# Altium PCB BRGTC6_Dual_Daughter.PcbDoc (part 2 of 2)
Units mil, origin at the board's own origin, x right, y up, seen from the top; angles counter-clockwise.
Board outline 5255 x 3080 mil, 4 copper layers (TOP, GND, PWR, BOT), stack 22.334 mil thick; 30 components, 45 nets, 287 pads, 36 vias.
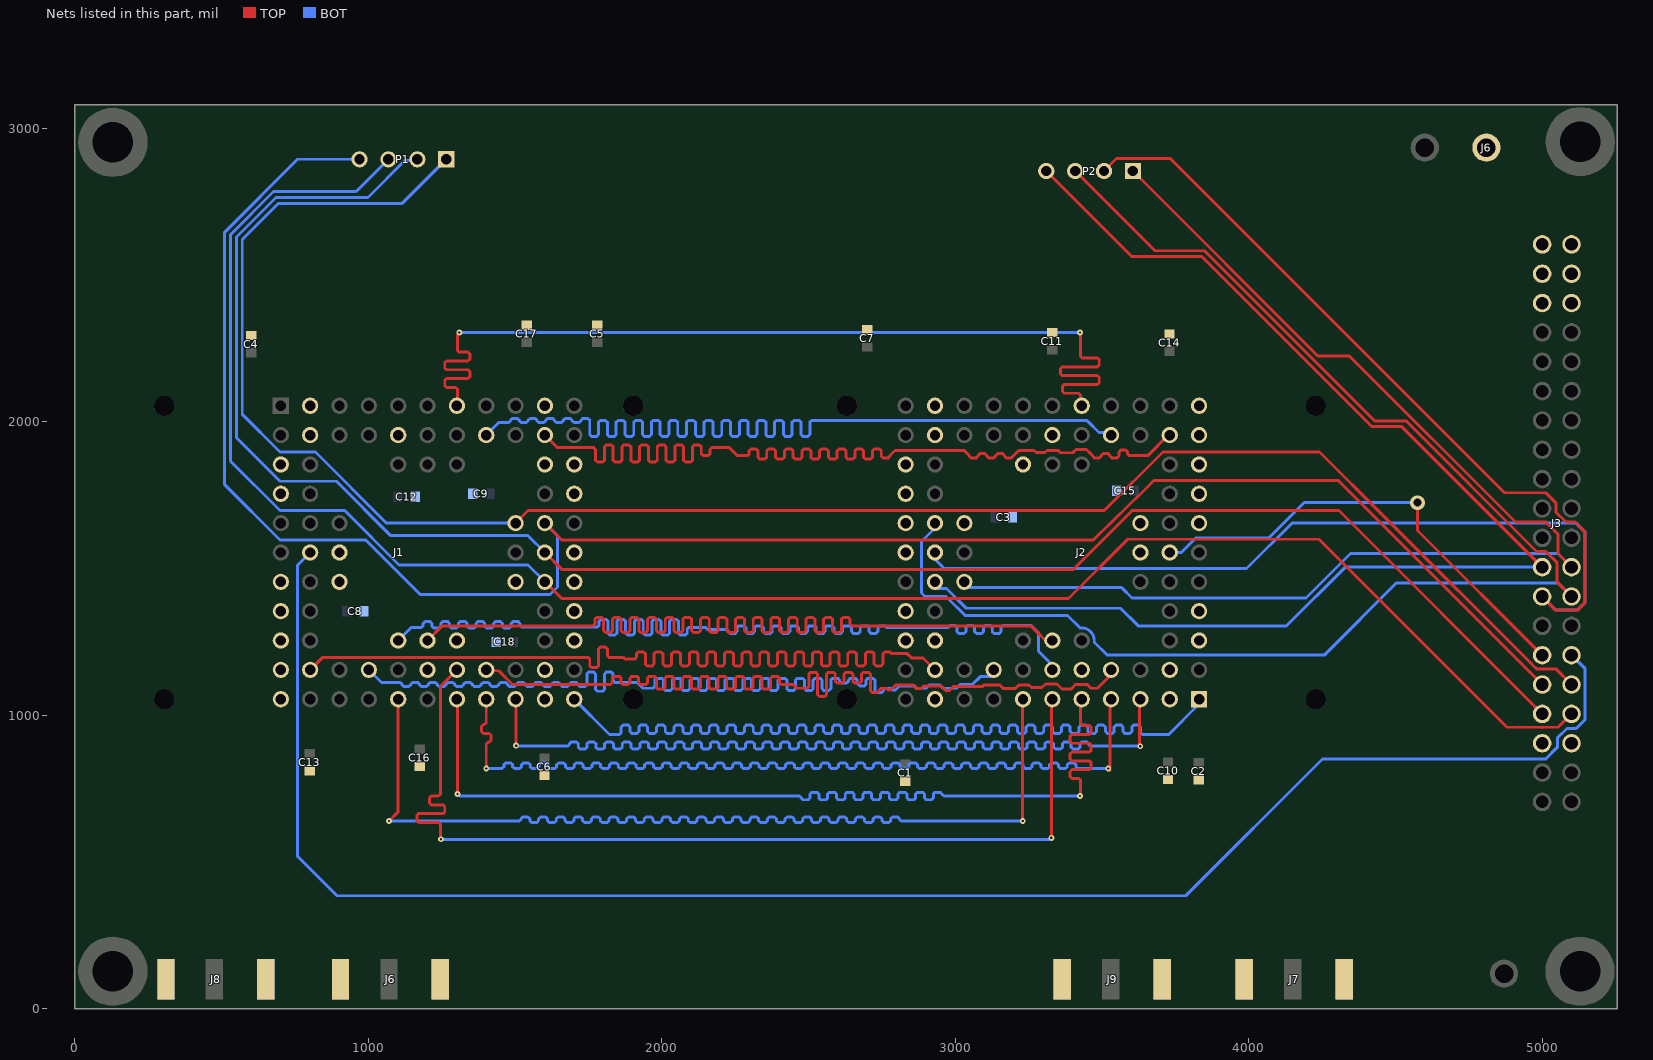
[diagram p4: the nets of this part, all layers, seen from the top]

## Via types
v1: diameter 19.68, hole 7.87, TOP to BOT, 30 vias
v2: diameter 50, hole 28, TOP to BOT, 6 vias

## Nets (pads, with @x,y where several pads share a name; then routed paths per layer and width w, separated by ;. In a path a pad name is that pad's centre, name@x,y a point inside that pad or via, vN(x,y) a via of type N, cw(c..) or ccw(c..) an arc to the next point about the centre after c; other vN are vias at no path point) (continued)
CRED_MSG_1_0_0: J1.L11 J2.A1 | length 3453.2
  BOT w10: J1.L11@1701.46,1055 1821.46,935 1855.46,935 1861.46,941 1861.46,960.35 1867.46,966.35 1885.46,966.35 1891.46,960.35 1891.46,944.85 1897.46,938.85 1915.46,938.85 1921.46,944.85 1921.46,960.35 1927.46,966.35 1945.46,966.35 1951.46,960.35 1951.46,944.85 1957.46,938.85 1975.46,938.85 1981.46,944.85 1981.46,960.35 1987.46,966.35 2005.46,966.35 2011.46,960.35 2011.46,944.85 2017.46,938.85 2035.46,938.85 2041.46,944.85 2041.46,960.35 2047.46,966.35 2065.46,966.35 2071.46,960.35 2071.46,944.85 2077.46,938.85 2095.46,938.85 2101.46,944.85 2101.46,960.35 2107.46,966.35 2125.46,966.35 2131.46,960.35 2131.46,944.85 2137.46,938.85 2155.46,938.85 2161.46,944.85 2161.46,960.35 2167.46,966.35 2185.46,966.35 2191.46,960.35 2191.46,944.85 2197.46,938.85 2215.46,938.85 2221.46,944.85 2221.46,960.35 2227.46,966.35 2245.46,966.35 2251.46,960.35 2251.46,944.85 2257.46,938.85 2275.46,938.85 2281.46,944.85 2281.46,960.35 2287.46,966.35 2305.46,966.35 2311.46,960.35 2311.46,944.85 2317.46,938.85 2335.46,938.85 2341.46,944.85 2341.46,960.35 2347.46,966.35 2365.46,966.35 2371.46,960.35 2371.46,944.85 2377.46,938.85 2395.46,938.85 2401.46,944.85 2401.46,960.35 2407.46,966.35 2425.46,966.35 2431.46,960.35 2431.46,944.85 2437.46,938.85 2455.46,938.85 2461.46,944.85 2461.46,960.35 2467.46,966.35 2485.46,966.35 2491.46,960.35 2491.46,944.85 2497.46,938.85 2515.46,938.85 2521.46,944.85 2521.46,960.35 2527.46,966.35 2545.46,966.35 2551.46,960.35 2551.46,944.85 2557.46,938.85 2575.46,938.85 2581.46,944.85 2581.46,960.35 2587.46,966.35 2605.46,966.35 2611.46,960.35 2611.46,944.85 2617.46,938.85 2635.46,938.85 2641.46,944.85 2641.46,960.35 2647.46,966.35 2665.46,966.35 2671.46,960.35 2671.46,944.85 2677.46,938.85 2695.46,938.85 2701.46,944.85 2701.46,960.35 2707.46,966.35 2725.46,966.35 2731.46,960.35 2731.46,944.85 2737.46,938.85 2755.46,938.85 2761.46,944.85 2761.46,960.35 2767.46,966.35 2785.46,966.35 2791.46,960.35 2791.46,944.85 2797.46,938.85 2815.46,938.85 2821.46,944.85 2821.46,960.35 2827.46,966.35 2845.46,966.35 2851.46,960.35 2851.46,944.85 2857.46,938.85 2875.46,938.85 2881.46,944.85 2881.46,960.35 2887.46,966.35 2905.46,966.35 2911.46,960.35 2911.46,944.85 2917.46,938.85 2935.46,938.85 2941.46,944.85 2941.46,960.35 2947.46,966.35 2965.46,966.35 2971.46,960.35 2971.46,944.85 2977.46,938.85 2995.46,938.85 3001.46,944.85 3001.46,960.35 3007.46,966.35 3025.46,966.35 3031.46,960.35 3031.46,944.85 3037.46,938.85 3055.46,938.85 3061.46,944.85 3061.46,960.35 3067.46,966.35 3085.46,966.35 3091.46,960.35 3091.46,944.85 3097.46,938.85 3115.46,938.85 3121.46,944.85 3121.46,960.35 3127.46,966.35 3145.46,966.35 3151.46,960.35 3151.46,944.85 3157.46,938.85 3175.46,938.85 3181.46,944.85 3181.46,960.35 3187.46,966.35 3205.46,966.35 3211.46,960.35 3211.46,944.85 3217.46,938.85 3235.46,938.85 3241.46,944.85 3241.46,960.35 3247.46,966.35 3265.46,966.35 3271.46,960.35 3271.46,944.85 3277.46,938.85 3295.46,938.85 3301.46,944.85 3301.46,960.35 3307.46,966.35 3325.46,966.35 3331.46,960.35 3331.46,944.85 3337.46,938.85 3355.46,938.85 3361.46,944.85 3361.46,960.35 3367.46,966.35 3385.46,966.35 3391.46,960.35 3391.46,944.85 3397.46,938.85 3415.46,938.85 3421.46,944.85 3421.46,960.35 3427.46,966.35 3445.46,966.35 3451.46,960.35 3451.46,944.85 3457.46,938.85 3475.46,938.85 3481.46,944.85 3481.46,960.35 3487.46,966.35 3505.46,966.35 3511.46,960.35 3511.46,944.85 3517.46,938.85 3535.46,938.85 3541.46,944.85 3541.46,960.35 3547.46,966.35 3565.46,966.35 3571.46,960.35 3571.46,944.85 3577.46,938.85 3595.46,938.85 3601.46,944.85 3601.46,960.35 3607.46,966.35 3625.46,966.35 3631.46,960.35 3631.46,941 3637.46,935 3727.36,935 J2.A1@3827.36,1035
CRED_MSG_1_0_1: J1.L9 J2.A3 | length 3425.9
  TOP w10: J1.L9@1501.46,1055 1503.23,1053.23 v1(1503.23,896.77) ; J2.A3@3627.36,1035 3627.36,897.64 v1(3630,895)
  BOT w10: v1(1503.23,896.77) 1505,895 1679,895 1685,901 1685,903.27 1691,909.27 1709,909.27 1715,903.27 1715,891.28 1721,885.28 1739,885.28 1745,891.28 1745,903.27 1751,909.27 1769,909.27 1775,903.27 1775,891.28 1781,885.28 1799,885.28 1805,891.28 1805,903.27 1811,909.27 1829,909.27 1835,903.27 1835,891.28 1841,885.28 1859,885.28 1865,891.28 1865,903.27 1871,909.27 1889,909.27 1895,903.27 1895,891.28 1901,885.28 1919,885.28 1925,891.28 1925,903.27 1931,909.27 1949,909.27 1955,903.27 1955,891.28 1961,885.28 1979,885.28 1985,891.28 1985,903.27 1991,909.27 2009,909.27 2015,903.27 2015,891.28 2021,885.28 2039,885.28 2045,891.28 2045,903.27 2051,909.27 2069,909.27 2075,903.27 2075,891.28 2081,885.28 2099,885.28 2105,891.28 2105,903.27 2111,909.27 2129,909.27 2135,903.27 2135,891.28 2141,885.28 2159,885.28 2165,891.28 2165,903.27 2171,909.27 2189,909.27 2195,903.27 2195,891.28 2201,885.28 2219,885.28 2225,891.28 2225,903.27 2231,909.27 2249,909.27 2255,903.27 2255,891.28 2261,885.28 2279,885.28 2285,891.28 2285,903.27 2291,909.27 2309,909.27 2315,903.27 2315,891.28 2321,885.28 2339,885.28 2345,891.28 2345,903.27 2351,909.27 2369,909.27 2375,903.27 2375,891.28 2381,885.28 2399,885.28 2405,891.28 2405,903.27 2411,909.27 2429,909.27 2435,903.27 2435,891.28 2441,885.28 2459,885.28 2465,891.28 2465,903.27 2471,909.27 2489,909.27 2495,903.27 2495,891.28 2501,885.28 2519,885.28 2525,891.28 2525,903.27 2531,909.27 2549,909.27 2555,903.27 2555,891.28 2561,885.28 2579,885.28 2585,891.28 2585,903.27 2591,909.27 2609,909.27 2615,903.27 2615,891.28 2621,885.28 2639,885.28 2645,891.28 2645,903.27 2651,909.27 2669,909.27 2675,903.27 2675,891.28 2681,885.28 2699,885.28 2705,891.28 2705,903.27 2711,909.27 2729,909.27 2735,903.27 2735,891.28 2741,885.28 2759,885.28 2765,891.28 2765,903.27 2771,909.27 2789,909.27 2795,903.27 2795,891.28 2801,885.28 2819,885.28 2825,891.28 2825,903.27 2831,909.27 2849,909.27 2855,903.27 2855,891.28 2861,885.28 2879,885.28 2885,891.28 2885,903.27 2891,909.27 2909,909.27 2915,903.27 2915,891.28 2921,885.28 2939,885.28 2945,891.28 2945,903.27 2951,909.27 2969,909.27 2975,903.27 2975,891.28 2981,885.28 2999,885.28 3005,891.28 3005,903.27 3011,909.27 3029,909.27 3035,903.27 3035,891.28 3041,885.28 3059,885.28 3065,891.28 3065,903.27 3071,909.27 3089,909.27 3095,903.27 3095,891.28 3101,885.28 3119,885.28 3125,891.28 3125,903.27 3131,909.27 3149,909.27 3155,903.27 3155,891.28 3161,885.28 3179,885.28 3185,891.28 3185,903.27 3191,909.27 3209,909.27 3215,903.27 3215,891.28 3221,885.28 3239,885.28 3245,891.28 3245,903.27 3251,909.27 3269,909.27 3275,903.27 3275,891.28 3281,885.28 3299,885.28 3305,891.28 3305,903.27 3311,909.27 3329,909.27 3335,903.27 3335,891.28 3341,885.28 3359,885.28 3365,891.28 3365,903.27 3371,909.27 3389,909.27 3395,903.27 3395,891.28 3401,885.28 3419,885.28 3425,891.28 3425,903.27 3431,909.27 3449,909.27 3455,903.27 3455,901 3461,895 v1(3630,895)
CRED_MSG_1_0_2: J1.L8 J2.A4 | length 3426.1
  TOP w10: v1(1401.46,818.54) 1401.46,902.54 1407.46,908.54 1411.33,908.54 1417.33,914.54 1417.33,932.54 1411.33,938.54 1391.58,938.54 1385.58,944.54 1385.58,962.54 1391.58,968.54 1395.46,968.54 1401.46,974.54 J1.L8@1401.46,1055 ; v1(3521.46,818.54) 3527.27,812.73 3527.31,812.78 3527.31,1034.95 J2.A4@3527.36,1035
  BOT w10: v1(1401.46,818.54) 1455.46,818.54 1461.46,824.54 1461.46,831.54 1467.46,837.54 1485.46,837.54 1491.46,831.54 1491.46,824.44 1497.46,818.44 1515.46,818.44 1521.46,824.44 1521.46,831.54 1527.46,837.54 1545.46,837.54 1551.46,831.54 1551.46,824.44 1557.46,818.44 1575.46,818.44 1581.46,824.44 1581.46,831.54 1587.46,837.54 1605.46,837.54 1611.46,831.54 1611.46,824.44 1617.46,818.44 1635.46,818.44 1641.46,824.44 1641.46,831.54 1647.46,837.54 1665.46,837.54 1671.46,831.54 1671.46,824.44 1677.46,818.44 1695.46,818.44 1701.46,824.44 1701.46,831.54 1707.46,837.54 1725.46,837.54 1731.46,831.54 1731.46,824.44 1737.46,818.44 1755.46,818.44 1761.46,824.44 1761.46,831.54 1767.46,837.54 1785.46,837.54 1791.46,831.54 1791.46,824.44 1797.46,818.44 1815.46,818.44 1821.46,824.44 1821.46,831.54 1827.46,837.54 1845.46,837.54 1851.46,831.54 1851.46,824.44 1857.46,818.44 1875.46,818.44 1881.46,824.44 1881.46,831.54 1887.46,837.54 1905.46,837.54 1911.46,831.54 1911.46,824.44 1917.46,818.44 1935.46,818.44 1941.46,824.44 1941.46,831.54 1947.46,837.54 1965.46,837.54 1971.46,831.54 1971.46,824.44 1977.46,818.44 1995.46,818.44 2001.46,824.44 2001.46,831.54 2007.46,837.54 2025.46,837.54 2031.46,831.54 2031.46,824.44 2037.46,818.44 2055.46,818.44 2061.46,824.44 2061.46,831.54 2067.46,837.54 2085.46,837.54 2091.46,831.54 2091.46,824.44 2097.46,818.44 2115.46,818.44 2121.46,824.44 2121.46,831.54 2127.46,837.54 2145.46,837.54 2151.46,831.54 2151.46,824.44 2157.46,818.44 2175.46,818.44 2181.46,824.44 2181.46,831.54 2187.46,837.54 2205.46,837.54 2211.46,831.54 2211.46,824.44 2217.46,818.44 2235.46,818.44 2241.46,824.44 2241.46,831.54 2247.46,837.54 2265.46,837.54 2271.46,831.54 2271.46,824.44 2277.46,818.44 2295.46,818.44 2301.46,824.44 2301.46,831.54 2307.46,837.54 2325.46,837.54 2331.46,831.54 2331.46,824.44 2337.46,818.44 2355.46,818.44 2361.46,824.44 2361.46,831.54 2367.46,837.54 2385.46,837.54 2391.46,831.54 2391.46,824.44 2397.46,818.44 2415.46,818.44 2421.46,824.44 2421.46,831.54 2427.46,837.54 2445.46,837.54 2451.46,831.54 2451.46,824.44 2457.46,818.44 2475.46,818.44 2481.46,824.44 2481.46,831.54 2487.46,837.54 2505.46,837.54 2511.46,831.54 2511.46,824.44 2517.46,818.44 2535.46,818.44 2541.46,824.44 2541.46,831.54 2547.46,837.54 2565.46,837.54 2571.46,831.54 2571.46,824.44 2577.46,818.44 2595.46,818.44 2601.46,824.44 2601.46,831.54 2607.46,837.54 2625.46,837.54 2631.46,831.54 2631.46,824.44 2637.46,818.44 2655.46,818.44 2661.46,824.44 2661.46,831.54 2667.46,837.54 2685.46,837.54 2691.46,831.54 2691.46,824.44 2697.46,818.44 2715.46,818.44 2721.46,824.44 2721.46,831.54 2727.46,837.54 2745.46,837.54 2751.46,831.54 2751.46,824.44 2757.46,818.44 2775.46,818.44 2781.46,824.44 2781.46,831.54 2787.46,837.54 2805.46,837.54 2811.46,831.54 2811.46,824.44 2817.46,818.44 2835.46,818.44 2841.46,824.44 2841.46,831.54 2847.46,837.54 2865.46,837.54 2871.46,831.54 2871.46,824.44 2877.46,818.44 2895.46,818.44 2901.46,824.44 2901.46,831.54 2907.46,837.54 2925.46,837.54 2931.46,831.54 2931.46,824.44 2937.46,818.44 2955.46,818.44 2961.46,824.44 2961.46,831.54 2967.46,837.54 2985.46,837.54 2991.46,831.54 2991.46,824.44 2997.46,818.44 3015.46,818.44 3021.46,824.44 3021.46,831.54 3027.46,837.54 3045.46,837.54 3051.46,831.54 3051.46,824.44 3057.46,818.44 3075.46,818.44 3081.46,824.44 3081.46,831.54 3087.46,837.54 3105.46,837.54 3111.46,831.54 3111.46,824.44 3117.46,818.44 3135.46,818.44 3141.46,824.44 3141.46,831.54 3147.46,837.54 3165.46,837.54 3171.46,831.54 3171.46,824.44 3177.46,818.44 3195.46,818.44 3201.46,824.44 3201.46,831.54 3207.46,837.54 3225.46,837.54 3231.46,831.54 3231.46,824.44 3237.46,818.44 3255.46,818.44 3261.46,824.44 3261.46,831.54 3267.46,837.54 3285.46,837.54 3291.46,831.54 3291.46,824.44 3297.46,818.44 3315.46,818.44 3321.46,824.44 3321.46,831.54 3327.46,837.54 3345.46,837.54 3351.46,831.54 3351.46,824.44 3357.46,818.44 3375.46,818.44 3381.46,824.44 3381.46,831.54 3387.46,837.54 3405.46,837.54 3411.46,831.54 3411.46,824.54 3417.46,818.54 v1(3521.46,818.54)
CRED_MSG_1_0_3: J1.K8 J2.B4 | length 3267.3
  TOP w10: J1.K8@1401.46,1155 1404.58,1151.87 1444.17,1151.87 1491.01,1105.04 1825.01,1105.04 1831.01,1111.04 1831.01,1127.03 1837.01,1133.03 1855.01,1133.03 1861.01,1127.03 1861.01,1111.04 1867.01,1105.04 1885.01,1105.04 1891.01,1111.04 1891.01,1127.03 1897.01,1133.03 1915.01,1133.03 1921.01,1127.03 1921.01,1111.04 1927.01,1105.04 1945.01,1105.04 1951.01,1111.04 1951.01,1127.03 1957.01,1133.03 1975.01,1133.03 1981.01,1127.03 1981.01,1095.06 1987.01,1089.06 2005.01,1089.06 2011.01,1095.06 2011.01,1127.03 2017.01,1133.03 2035.01,1133.03 2041.01,1127.03 2041.01,1095.06 2047.01,1089.06 2065.01,1089.06 2071.01,1095.06 2071.01,1127.03 2077.01,1133.03 2095.01,1133.03 2101.01,1127.03 2101.01,1095.06 2107.01,1089.06 2125.01,1089.06 2131.01,1095.06 2131.01,1127.03 2137.01,1133.03 2155.01,1133.03 2161.01,1127.03 2161.01,1095.06 2167.01,1089.06 2185.01,1089.06 2191.01,1095.06 2191.01,1127.03 2197.01,1133.03 2215.01,1133.03 2221.01,1127.03 2221.01,1095.06 2227.01,1089.06 2245.01,1089.06 2251.01,1095.06 2251.01,1127.03 2257.01,1133.03 2275.01,1133.03 2281.01,1127.03 2281.01,1095.06 2287.01,1089.06 2305.01,1089.06 2311.01,1095.06 2311.01,1127.03 2317.01,1133.03 2335.01,1133.03 2341.01,1127.03 2341.01,1095.06 2347.01,1089.06 2365.01,1089.06 2371.01,1095.06 2371.01,1127.03 2377.01,1133.03 2395.01,1133.03 2401.01,1127.03 2401.01,1111.04 2407.01,1105.04 2448.01,1105.04 2460.76,1092.28 2494.76,1092.28 2500.76,1098.28 2500.76,1140.65 2506.76,1146.65 2524.76,1146.65 2530.76,1140.65 2530.76,1070.37 2536.76,1064.37 2554.76,1064.37 2560.76,1070.37 2560.76,1140.65 2566.76,1146.65 2584.76,1146.65 2590.76,1140.65 2590.76,1115.86 2596.62,1110 2614.9,1110 2620.76,1115.86 2620.76,1140.65 2626.76,1146.65 2644.76,1146.65 2650.76,1140.65 2650.76,1115.86 2656.62,1110 2674.9,1110 2680.76,1115.86 2680.76,1140.65 2686.76,1146.65 2704.76,1146.65 2710.76,1140.65 2710.76,1083.82 2716.76,1077.82 2734.76,1077.82 2740.76,1083.82 2740.76,1085.97 2746.76,1091.97 2764.76,1091.97 2770.76,1085.97 2779.13,1085.97 2795.95,1102.78 2855.95,1102.78 2866.76,1091.97 2884.76,1091.97 2892.79,1100 2952.29,1100 2968.47,1083.82 2980.76,1083.82 2980.76,1085.97 2992.51,1097.72 3091.62,1097.72 3096.69,1102.78 3152.22,1102.78 3163.03,1091.97 3205.13,1091.97 3215.95,1102.78 3251.13,1102.78 3259.37,1094.55 3294.55,1094.55 3307.26,1107.26 3346.76,1107.26 3364.03,1090 3395,1090 3410,1105 3450,1105 3462.72,1092.28 3484.65,1092.28 J2.B4@3527.36,1135
CRED_MSG_1_0_4: J1.K7 J2.A6 | length 3377.3
  TOP w10: v1(1247.5,577.5) 1245,575 1245,629 1239,635 1170.86,635 1165,640.86 1165,659.14 1170.86,665 1254.14,665 1260,670.86 1260,689.14 1254.14,695 1214.19,695 1208.19,701 1208.19,719 1214.19,725 1239,725 1245,731 1245,1098.54 J1.K7@1301.46,1155 ; v1(3327.36,582.36) J2.A6@3327.36,1035
  BOT w10: v1(1247.5,577.5) 3322.5,577.5 v1(3327.36,582.36)
CRED_MSG_1_0_5: J1.L7 J2.A5 | length 3426.3
  TOP w10: J1.L7@1301.46,1055 1303.23,1053.23 v1(1303.23,731.77) ; v1(3425,725) 3427.36,727.36 3427.36,779 3421.36,785 3397.58,785 3391.58,791 3391.58,809 3397.58,815 3457.14,815 3463.14,821 3463.14,839 3457.14,845 3397.58,845 3391.58,851 3391.58,869 3397.58,875 3457.14,875 3463.14,881 3463.14,899 3457.14,905 3397.58,905 3391.58,911 3391.58,929 3397.58,935 3457.14,935 3463.14,941 3463.14,959 3457.14,965 3433.36,965 3427.36,971 J2.A5@3427.36,1035
  BOT w10: v1(1303.23,731.77) 1310,725 2469,725 2475,719 2475,718.32 2481,712.32 2499,712.32 2505,718.32 2505,731.7 2511,737.7 2529,737.7 2535,731.7 2535,718.32 2541,712.32 2559,712.32 2565,718.32 2565,731.7 2571,737.7 2589,737.7 2595,731.7 2595,718.32 2601,712.32 2619,712.32 2625,718.32 2625,731.7 2631,737.7 2649,737.7 2655,731.7 2655,718.32 2661,712.32 2679,712.32 2685,718.32 2685,731.7 2691,737.7 2709,737.7 2715,731.7 2715,718.32 2721,712.32 2739,712.32 2745,718.32 2745,731.7 2751,737.7 2769,737.7 2775,731.7 2775,718.32 2781,712.32 2799,712.32 2805,718.32 2805,731.7 2811,737.7 2829,737.7 2835,731.7 2835,718.32 2841,712.32 2859,712.32 2865,718.32 2865,731.7 2871,737.7 2889,737.7 2895,731.7 2895,718.32 2901,712.32 2919,712.32 2925,718.32 2925,731.7 2931,737.7 2949,737.7 2955,731.7 2955,731 2961,725 v1(3425,725)
CRED_MSG_1_0_6: J1.J6 J2.C6 | length 3453.2
  TOP w10: J1.J6@1201.46,1255 1251.46,1305 1765.46,1305 1771.46,1311 1771.46,1327.75 1777.46,1333.75 1795.46,1333.75 1801.46,1327.75 1801.46,1288.64 1807.46,1282.64 1825.46,1282.64 1831.46,1288.64 1831.46,1327.75 1837.46,1333.75 1855.46,1333.75 1861.46,1327.75 1861.46,1288.64 1867.46,1282.64 1885.46,1282.64 1891.46,1288.64 1891.46,1327.75 1897.46,1333.75 1915.46,1333.75 1921.46,1327.75 1921.46,1288.64 1927.46,1282.64 1945.46,1282.64 1951.46,1288.64 1951.46,1327.75 1957.46,1333.75 1975.46,1333.75 1981.46,1327.75 1981.46,1288.64 1987.46,1282.64 2005.46,1282.64 2011.46,1288.64 2011.46,1327.75 2017.46,1333.75 2035.46,1333.75 2041.46,1327.75 2041.46,1288.64 2047.46,1282.64 2065.46,1282.64 2071.46,1288.64 2071.46,1327.75 2077.46,1333.75 2095.46,1333.75 2101.46,1327.75 2101.46,1288.64 2107.46,1282.64 2125.46,1282.64 2131.46,1288.64 2131.46,1327.75 2137.46,1333.75 2155.46,1333.75 2161.46,1327.75 2161.46,1288.64 2167.46,1282.64 2185.46,1282.64 2191.46,1288.64 2191.46,1327.75 2197.46,1333.75 2215.46,1333.75 2221.46,1327.75 2221.46,1288.64 2227.46,1282.64 2245.46,1282.64 2251.46,1288.64 2251.46,1327.75 2257.46,1333.75 2275.46,1333.75 2281.46,1327.75 2281.46,1288.64 2287.46,1282.64 2305.46,1282.64 2311.46,1288.64 2311.46,1327.75 2317.46,1333.75 2335.46,1333.75 2341.46,1327.75 2341.46,1288.64 2347.46,1282.64 2365.46,1282.64 2371.46,1288.64 2371.46,1327.75 2377.46,1333.75 2395.46,1333.75 2401.46,1327.75 2401.46,1288.64 2407.46,1282.64 2425.46,1282.64 2431.46,1288.64 2431.46,1327.75 2437.46,1333.75 2455.46,1333.75 2461.46,1327.75 2461.46,1288.64 2467.46,1282.64 2485.46,1282.64 2491.46,1288.64 2491.46,1327.75 2497.46,1333.75 2515.46,1333.75 2521.46,1327.75 2521.46,1288.64 2527.46,1282.64 2545.46,1282.64 2551.46,1288.64 2551.46,1327.75 2557.46,1333.75 2575.46,1333.75 2581.46,1327.75 2581.46,1288.64 2587.46,1282.64 2605.46,1282.64 2611.46,1288.64 2611.46,1327.75 2617.46,1333.75 2635.46,1333.75 2641.46,1327.75 2641.46,1311 2647.46,1305 3257.36,1305 J2.C6@3327.36,1235
CRED_MSG_1_0_7: J1.J5 J2.B6 | length 3446.2
  BOT w10: J1.J5@1101.46,1255 1146.46,1300 1180.46,1300 1186.46,1306 1186.46,1313.25 1192.46,1319.25 1210.46,1319.25 1216.46,1313.25 1216.46,1303.72 1222.46,1297.72 1240.46,1297.72 1246.46,1303.72 1246.46,1313.25 1252.46,1319.25 1270.46,1319.25 1276.46,1313.25 1276.46,1303.72 1282.46,1297.72 1300.46,1297.72 1306.46,1303.72 1306.46,1313.25 1312.46,1319.25 1330.46,1319.25 1336.46,1313.25 1336.46,1303.72 1342.46,1297.72 1360.46,1297.72 1366.46,1303.72 1366.46,1313.25 1372.46,1319.25 1390.46,1319.25 1396.46,1313.25 1396.46,1303.72 1402.46,1297.72 1420.46,1297.72 1426.46,1303.72 1426.46,1313.25 1432.46,1319.25 1450.46,1319.25 1456.46,1313.25 1456.46,1303.72 1462.46,1297.72 1480.46,1297.72 1486.46,1303.72 1486.46,1313.25 1492.46,1319.25 1510.46,1319.25 1516.46,1313.25 1516.46,1307.34 1522.46,1301.34 1780.46,1301.34 1786.46,1307.34 1786.46,1320.61 1792.46,1326.61 1810.46,1326.61 1816.46,1320.61 1816.46,1279.39 1822.46,1273.39 1840.46,1273.39 1846.46,1279.39 1846.46,1320.61 1852.46,1326.61 1870.46,1326.61 1876.46,1320.61 1876.46,1279.39 1882.46,1273.39 1900.46,1273.39 1906.46,1279.39 1906.46,1320.61 1912.46,1326.61 1930.46,1326.61 1936.46,1320.61 1936.46,1279.39 1942.46,1273.39 1960.46,1273.39 1966.46,1279.39 1966.46,1320.61 1972.46,1326.61 1990.46,1326.61 1996.46,1320.61 1996.46,1279.39 2002.46,1273.39 2020.46,1273.39 2026.46,1279.39 2026.46,1320.61 2032.46,1326.61 2050.46,1326.61 2056.46,1320.61 2056.46,1279.39 2062.46,1273.39 2080.46,1273.39 2086.46,1279.39 2086.46,1294 2092.46,1300 2148.26,1300 2155.98,1292.28 2219.98,1292.28 2225.98,1286.28 2225.98,1285.4 2231.98,1279.4 2249.98,1279.4 2255.98,1285.4 2255.98,1299.15 2261.98,1305.15 2279.98,1305.15 2285.98,1299.15 2285.98,1285.4 2291.98,1279.4 2309.98,1279.4 2315.98,1285.4 2315.98,1299.15 2321.98,1305.15 2339.98,1305.15 2345.98,1299.15 2345.98,1285.4 2351.98,1279.4 2369.98,1279.4 2375.98,1285.4 2375.98,1299.15 2381.98,1305.15 2399.98,1305.15 2405.98,1299.15 2405.98,1285.4 2411.98,1279.4 2429.98,1279.4 2435.98,1285.4 2435.98,1299.15 2441.98,1305.15 2459.98,1305.15 2465.98,1299.15 2465.98,1285.4 2471.98,1279.4 2489.98,1279.4 2495.98,1285.4 2495.98,1299.15 2501.98,1305.15 2519.98,1305.15 2525.98,1299.15 2525.98,1285.4 2531.98,1279.4 2549.98,1279.4 2555.98,1285.4 2555.98,1299.15 2561.98,1305.15 2579.98,1305.15 2585.98,1299.15 2585.98,1285.4 2591.98,1279.4 2609.98,1279.4 2615.98,1285.4 2615.98,1299.15 2621.98,1305.15 2639.98,1305.15 2645.98,1299.15 2645.98,1285.4 2651.98,1279.4 2669.98,1279.4 2675.98,1285.4 2675.98,1299.15 2681.98,1305.15 2699.98,1305.15 2705.98,1299.15 2705.98,1285.4 2711.98,1279.4 2729.98,1279.4 2735.98,1285.4 2735.98,1299.15 2741.98,1305.15 2759.98,1305.15 2765.98,1299.15 2975.61,1299.15 2981.98,1305.51 2999.98,1305.51 3005.98,1299.51 3005.98,1285.01 3011.98,1279.01 3029.98,1279.01 3035.98,1285.01 3035.98,1299.51 3041.98,1305.51 3059.98,1305.51 3065.98,1299.51 3065.98,1285.01 3071.98,1279.01 3089.98,1279.01 3095.98,1285.01 3095.98,1299.51 3101.98,1305.51 3119.98,1305.51 3125.98,1299.51 3125.98,1285.01 3131.98,1279.01 3149.98,1279.01 3155.98,1285.01 3155.98,1299.51 3161.98,1305.51 3259.49,1305.51 3283.24,1281.76 3283.24,1218.72 3324.24,1177.72 3324.24,1138.13 J2.B6@3327.36,1135
CRED_REPAIR_0_1: J1.B10 J2.K2 | length 3382.2
  TOP w10: J1.B10@1601.46,1955 1644.17,1912.28 1768.17,1912.28 1774.17,1906.28 1774.17,1869.31 1780.17,1863.31 1798.17,1863.31 1804.17,1869.31 1804.17,1915.25 1810.17,1921.25 1828.17,1921.25 1834.17,1915.25 1834.17,1869.31 1840.17,1863.31 1858.17,1863.31 1864.17,1869.31 1864.17,1915.25 1870.17,1921.25 1888.17,1921.25 1894.17,1915.25 1894.17,1869.31 1900.17,1863.31 1918.17,1863.31 1924.17,1869.31 1924.17,1915.25 1930.17,1921.25 1948.17,1921.25 1954.17,1915.25 1954.17,1869.31 1960.17,1863.31 1978.17,1863.31 1984.17,1869.31 1984.17,1915.25 1990.17,1921.25 2008.17,1921.25 2014.17,1915.25 2014.17,1869.31 2020.17,1863.31 2038.17,1863.31 2044.17,1869.31 2044.17,1915.25 2050.17,1921.25 2068.17,1921.25 2074.17,1915.25 2074.17,1869.31 2080.17,1863.31 2098.17,1863.31 2104.17,1869.31 2104.17,1915.25 2110.17,1921.25 2128.17,1921.25 2134.17,1915.25 2134.17,1891.38 2140.17,1885.38 2158.17,1885.38 2164.17,1891.38 2164.17,1906.28 2170.17,1912.28 2230.23,1912.28 2257.52,1885 2291.52,1885 2297.52,1891 2297.52,1901.5 2303.52,1907.5 2321.52,1907.5 2327.52,1901.5 2327.52,1879.47 2333.52,1873.47 2351.52,1873.47 2357.52,1879.47 2357.52,1901.5 2363.52,1907.5 2381.52,1907.5 2387.52,1901.5 2387.52,1879.47 2393.52,1873.47 2411.52,1873.47 2417.52,1879.47 2417.52,1901.5 2423.52,1907.5 2441.52,1907.5 2447.52,1901.5 2447.52,1879.47 2453.52,1873.47 2471.52,1873.47 2477.52,1879.47 2477.52,1901.5 2483.52,1907.5 2501.52,1907.5 2507.52,1901.5 2507.52,1879.47 2513.52,1873.47 2531.52,1873.47 2537.52,1879.47 2537.52,1901.5 2543.52,1907.5 2561.52,1907.5 2567.52,1901.5 2567.52,1879.47 2573.52,1873.47 2591.52,1873.47 2597.52,1879.47 2597.52,1901.5 2603.52,1907.5 2621.52,1907.5 2627.52,1901.5 2627.52,1879.47 2633.52,1873.47 2651.52,1873.47 2657.52,1879.47 2657.52,1901.5 2663.52,1907.5 2681.52,1907.5 2687.52,1901.5 2687.52,1879.47 2693.52,1873.47 2711.52,1873.47 2717.52,1879.47 2717.52,1901.5 2723.52,1907.5 2741.52,1907.5 2747.52,1901.5 2747.52,1883.72 2753.52,1877.72 2771.52,1877.72 2777.52,1883.72 2777.52,1885.78 2794.33,1902.6 3030.7,1902.6 3047.52,1885.78 3047.52,1883.72 3053.52,1877.72 3071.52,1877.72 3077.52,1883.72 3077.52,1885.78 3083.52,1891.78 3101.52,1891.78 3107.52,1885.78 3107.52,1883.72 3113.52,1877.72 3131.52,1877.72 3137.52,1883.72 3137.52,1885.78 3143.52,1891.78 3161.52,1891.78 3167.52,1885.78 3167.52,1883.72 3173.52,1877.72 3191.52,1877.72 3216.4,1902.6 3268.64,1902.6 3273.03,1898.2 3275.96,1895.27 3306.14,1895.27 3313.46,1902.6 3350.69,1902.6 3358.28,1895 3400,1895 3410.91,1905.91 3447.12,1905.91 3461.25,1891.78 3461.52,1891.78 3467.52,1885.78 3467.52,1883.72 3473.52,1877.72 3491.52,1877.72 3497.52,1883.72 3497.52,1885.78 3503.52,1891.78 3521.52,1891.78 3527.52,1885.78 3527.52,1883.72 3533.52,1877.72 3551.52,1877.72 3557.52,1883.72 3557.52,1897.75 3563.52,1903.75 3581.52,1903.75 3587.52,1897.75 3587.52,1891 3593.52,1885 3655.79,1885 J2.K2@3725.79,1955
CRED_REPAIR_1_0: J1.K2 J2.B10 | length 3442.5
  TOP w10: J1.K2@801.46,1155 844.17,1197.72 1748.17,1197.72 1754.17,1191.72 1754.17,1169.07 1760.17,1163.07 1778.17,1163.07 1784.17,1169.07 1784.17,1226.36 1790.17,1232.36 1808.17,1232.36 1814.17,1226.36 1814.17,1203.72 1820.17,1197.72 1868.06,1197.72 1873.49,1192.28 1907.49,1192.28 1913.49,1198.28 1913.49,1210.02 1919.49,1216.02 1937.49,1216.02 1943.49,1210.02 1943.49,1174.5 1949.49,1168.5 1967.49,1168.5 1973.49,1174.5 1973.49,1210.02 1979.49,1216.02 1997.49,1216.02 2003.49,1210.02 2003.49,1174.5 2009.49,1168.5 2027.49,1168.5 2033.49,1174.5 2033.49,1210.02 2039.49,1216.02 2057.49,1216.02 2063.49,1210.02 2063.49,1174.5 2069.49,1168.5 2087.49,1168.5 2093.49,1174.5 2093.49,1210.02 2099.49,1216.02 2117.49,1216.02 2123.49,1210.02 2123.49,1174.5 2129.49,1168.5 2147.49,1168.5 2153.49,1174.5 2153.49,1210.02 2159.49,1216.02 2177.49,1216.02 2183.49,1210.02 2183.49,1174.5 2189.49,1168.5 2207.49,1168.5 2213.49,1174.5 2213.49,1210.02 2219.49,1216.02 2237.49,1216.02 2243.49,1210.02 2243.49,1174.5 2249.49,1168.5 2267.49,1168.5 2273.49,1174.5 2273.49,1210.02 2279.49,1216.02 2297.49,1216.02 2303.49,1210.02 2303.49,1174.5 2309.49,1168.5 2327.49,1168.5 2333.49,1174.5 2333.49,1210.02 2339.49,1216.02 2357.49,1216.02 2363.49,1210.02 2363.49,1174.5 2369.49,1168.5 2387.49,1168.5 2393.49,1174.5 2393.49,1210.02 2399.49,1216.02 2417.49,1216.02 2423.49,1210.02 2423.49,1174.5 2429.49,1168.5 2447.49,1168.5 2453.49,1174.5 2453.49,1210.02 2459.49,1216.02 2477.49,1216.02 2483.49,1210.02 2483.49,1174.5 2489.49,1168.5 2507.49,1168.5 2513.49,1174.5 2513.49,1210.02 2519.49,1216.02 2537.49,1216.02 2543.49,1210.02 2543.49,1174.5 2549.49,1168.5 2567.49,1168.5 2573.49,1174.5 2573.49,1210.02 2579.49,1216.02 2597.49,1216.02 2603.49,1210.02 2603.49,1174.5 2609.49,1168.5 2627.49,1168.5 2633.49,1174.5 2633.49,1210.02 2639.49,1216.02 2657.49,1216.02 2663.49,1210.02 2663.49,1174.5 2669.49,1168.5 2687.49,1168.5 2693.49,1174.5 2693.49,1210.02 2699.49,1216.02 2717.49,1216.02 2723.49,1210.02 2723.49,1174.5 2729.49,1168.5 2747.49,1168.5 2753.49,1174.5 2753.49,1210.02 2759.49,1216.02 2777.49,1216.02 2783.49,1210.02 2836.18,1210.02 2851.2,1195 2890.79,1195 2893.72,1192.07 J2.B10@2930.79,1155
CRED_RST_0_1: J1.B8 J2.K4 | length 3459.7
  BOT w10: J1.B8@1401.46,1955 1444.17,1997.72 1478.17,1997.72 1484.17,2003.72 1484.17,2005.41 1490.17,2011.41 1508.17,2011.41 1514.17,2005.41 1514.17,2003.87 1520.17,1997.87 1538.17,1997.87 1544.17,2003.87 1544.17,2005.41 1550.17,2011.41 1568.17,2011.41 1574.17,2005.41 1574.17,2003.87 1580.17,1997.87 1598.17,1997.87 1604.17,2003.87 1604.17,2005.41 1610.17,2011.41 1628.17,2011.41 1634.17,2005.41 1634.17,2003.87 1640.17,1997.87 1658.17,1997.87 1664.17,2003.87 1664.17,2005.41 1670.17,2011.41 1688.17,2011.41 1694.17,2005.41 1694.17,2003.87 1700.17,1997.87 1718.17,1997.87 1724.17,2003.87 1724.17,2005.41 1730.17,2011.41 1748.17,2011.41 1754.17,2005.41 1754.17,1956.75 1760.17,1950.75 1778.17,1950.75 1784.17,1956.75 1784.17,1998.96 1790.17,2004.96 1808.17,2004.96 1814.17,1998.96 1814.17,1956.75 1820.17,1950.75 1838.17,1950.75 1844.17,1956.75 1844.17,1998.96 1850.17,2004.96 1868.17,2004.96 1874.17,1998.96 1874.17,1956.75 1880.17,1950.75 1898.17,1950.75 1904.17,1956.75 1904.17,1998.96 1910.17,2004.96 1928.17,2004.96 1934.17,1998.96 1934.17,1956.75 1940.17,1950.75 1958.17,1950.75 1964.17,1956.75 1964.17,1998.96 1970.17,2004.96 1988.17,2004.96 1994.17,1998.96 1994.17,1956.75 2000.17,1950.75 2018.17,1950.75 2024.17,1956.75 2024.17,1998.96 2030.17,2004.96 2048.17,2004.96 2054.17,1998.96 2054.17,1956.75 2060.17,1950.75 2078.17,1950.75 2084.17,1956.75 2084.17,1998.96 2090.17,2004.96 2108.17,2004.96 2114.17,1998.96 2114.17,1956.75 2120.17,1950.75 2138.17,1950.75 2144.17,1956.75 2144.17,1998.96 2150.17,2004.96 2168.17,2004.96 2174.17,1998.96 2174.17,1956.75 2180.17,1950.75 2198.17,1950.75 2204.17,1956.75 2204.17,1998.96 2210.17,2004.96 2228.17,2004.96 2234.17,1998.96 2234.17,1956.75 2240.17,1950.75 2258.17,1950.75 2264.17,1956.75 2264.17,1998.96 2270.17,2004.96 2288.17,2004.96 2294.17,1998.96 2294.17,1956.75 2300.17,1950.75 2318.17,1950.75 2324.17,1956.75 2324.17,1998.96 2330.17,2004.96 2348.17,2004.96 2354.17,1998.96 2354.17,1956.75 2360.17,1950.75 2378.17,1950.75 2384.17,1956.75 2384.17,1998.96 2390.17,2004.96 2408.17,2004.96 2414.17,1998.96 2414.17,1956.75 2420.17,1950.75 2438.17,1950.75 2444.17,1956.75 2444.17,1998.96 2450.17,2004.96 2468.17,2004.96 2474.17,1998.96 2474.17,1956.75 2480.17,1950.75 2498.17,1950.75 2504.17,1956.75 2504.17,1999.14 2510.03,2005 2628.01,2005 ccw(c2630,2055) 2631.99,2005 3448.49,2005 3451.42,2002.07 3489.8,1963.69 3522.09,1963.69 J2.K4@3530.79,1955
CRED_RST_1_0: J1.K4 J2.B8 | length 3336.4
  BOT w10: J1.K4@1001.46,1155 1044.17,1112.28 1108.17,1112.28 1114.17,1106.28 1114.17,1104.28 1120.17,1098.28 1138.17,1098.28 1144.17,1104.28 1144.17,1106.28 1150.17,1112.28 1168.17,1112.28 1174.17,1106.28 1174.17,1104.28 1180.17,1098.28 1198.17,1098.28 1204.17,1104.28 1204.17,1106.28 1210.17,1112.28 1228.17,1112.28 1234.17,1106.28 1234.17,1104.28 1240.17,1098.28 1258.17,1098.28 1264.17,1104.28 1264.17,1106.28 1270.17,1112.28 1288.17,1112.28 1294.17,1106.28 1294.17,1104.28 1300.17,1098.28 1318.17,1098.28 1324.17,1104.28 1324.17,1106.28 1330.17,1112.28 1348.17,1112.28 1354.17,1106.28 1354.17,1104.28 1360.17,1098.28 1378.17,1098.28 1384.17,1104.28 1384.17,1106.28 1390.17,1112.28 1408.17,1112.28 1414.17,1106.28 1414.17,1104.28 1420.17,1098.28 1438.17,1098.28 1444.17,1104.28 1444.17,1106.28 1450.17,1112.28 1468.17,1112.28 1474.17,1106.28 1474.17,1104.28 1480.17,1098.28 1498.17,1098.28 1504.17,1104.28 1504.17,1106.28 1510.17,1112.28 1528.17,1112.28 1534.17,1106.28 1534.17,1104.28 1540.17,1098.28 1558.17,1098.28 1564.17,1104.28 1564.17,1106.28 1570.17,1112.28 1588.17,1112.28 1594.17,1106.28 1594.17,1104.28 1600.17,1098.28 1618.17,1098.28 1624.17,1104.28 1624.17,1106.28 1630.17,1112.28 1648.17,1112.28 1654.17,1106.28 1654.17,1104.28 1660.17,1098.28 1678.17,1098.28 1684.17,1104.28 1684.17,1106.28 1690.17,1112.28 1708.17,1112.28 1714.17,1106.28 1714.17,1104.28 1720.17,1098.28 1738.17,1098.28 1744.17,1104.28 1744.17,1141.01 1750.17,1147.01 1768.17,1147.01 1774.17,1141.01 1774.17,1088.06 1780.17,1082.06 1798.17,1082.06 1804.17,1088.06 1804.17,1141.01 1810.17,1147.01 1828.17,1147.01 1834.17,1141.01 1834.17,1118.28 1840.17,1112.28 1915.73,1112.28 1935.73,1092.28 1969.73,1092.28 1975.73,1098.28 1975.73,1120.28 1981.73,1126.28 1999.73,1126.28 2005.73,1120.28 2005.73,1091.04 2011.73,1085.04 2029.73,1085.04 2035.73,1091.04 2035.73,1120.28 2041.73,1126.28 2059.73,1126.28 2065.73,1120.28 2065.73,1091.04 2071.73,1085.04 2089.73,1085.04 2095.73,1091.04 2095.73,1120.28 2101.73,1126.28 2119.73,1126.28 2125.73,1120.28 2125.73,1091.04 2131.73,1085.04 2149.73,1085.04 2155.73,1091.04 2155.73,1120.28 2161.73,1126.28 2179.73,1126.28 2185.73,1120.28 2185.73,1091.04 2191.73,1085.04 2209.73,1085.04 2215.73,1091.04 2215.73,1120.28 2221.73,1126.28 2239.73,1126.28 2245.73,1120.28 2245.73,1091.04 2251.73,1085.04 2269.73,1085.04 2275.73,1091.04 2275.73,1120.28 2281.73,1126.28 2299.73,1126.28 2305.73,1120.28 2305.73,1091.04 2311.73,1085.04 2329.73,1085.04 2335.73,1091.04 2335.73,1120.28 2341.73,1126.28 2359.73,1126.28 2365.73,1120.28 2365.73,1091.04 2371.73,1085.04 2389.73,1085.04 2395.73,1091.04 2395.73,1120.28 2401.73,1126.28 2419.73,1126.28 2425.73,1120.28 2425.73,1091.04 2431.73,1085.04 2449.73,1085.04 2455.73,1091.04 2455.73,1120.28 2461.73,1126.28 2479.73,1126.28 2485.73,1120.28 2485.73,1091.04 2491.73,1085.04 2509.73,1085.04 2515.73,1091.04 2515.73,1120.28 2521.73,1126.28 2539.73,1126.28 2545.73,1120.28 2545.73,1091.04 2551.73,1085.04 2569.73,1085.04 2575.73,1091.04 2575.73,1120.28 2581.73,1126.28 2599.73,1126.28 2605.73,1120.28 2605.73,1115.86 2611.58,1110 2629.87,1110 2635.73,1115.86 2635.73,1120.28 2641.73,1126.28 2659.73,1126.28 2665.73,1120.28 2665.73,1109.04 2674.77,1100 2689.87,1100 2695.73,1105.86 2695.73,1120.28 2701.73,1126.28 2719.73,1126.28 2725.73,1120.28 2725.73,1084.11 2731.73,1078.11 2749.73,1078.11 2755.73,1084.11 2755.73,1086.26 2761.73,1092.26 2779.73,1092.26 2785.73,1086.26 2795.99,1086.26 2809.73,1100 2861.98,1100 2869.73,1092.26 2899.73,1092.26 2910.54,1103.07 2948.07,1103.07 2958.88,1092.26 3003.87,1092.26 3016.61,1105 3057.77,1105 3084.65,1131.87 3124.24,1131.87 J2.B8@3127.36,1135
CRED_VAL_0_1: J1.A7 J2.L5 | length 3406.2
  TOP w10: J1.A7@1301.46,2055 1303.23,2056.77 1303.23,2111.72 1297.23,2117.72 1266.14,2117.72 1260.14,2123.72 1260.14,2141.72 1266.14,2147.72 1339.54,2147.72 1345.54,2153.72 1345.54,2171.72 1339.54,2177.72 1266.14,2177.72 1260.14,2183.72 1260.14,2201.72 1266.14,2207.72 1339.54,2207.72 1345.54,2213.72 1345.54,2231.72 1339.54,2237.72 1309.23,2237.72 1303.23,2243.72 1303.23,2298.23 v1(1310,2305) ; J2.L5@3425.79,2055 3426.18,2055.39 3426.18,2091.72 3420.18,2097.72 3371.02,2097.72 3365.02,2103.72 3365.02,2121.72 3371.02,2127.72 3484.64,2127.72 3490.64,2133.72 3490.64,2151.72 3484.64,2157.72 3364.42,2157.72 3358.42,2163.72 3358.42,2181.72 3364.42,2187.72 3484.64,2187.72 3490.64,2193.72 3490.64,2211.72 3484.64,2217.72 3432.18,2217.72 3426.18,2223.72 v1@3426.18,2303.82
  BOT w10: v1(1310,2305) v1(3425,2305) v1@3426.18,2303.82
CRED_VAL_1_0: J1.L5 J2.A7 | length 3468.7
  TOP w10: v1(1070,640) 1101.46,671.46 J1.L5@1101.46,1055 ; J2.A7@3227.36,1035 3228.68,1033.68 3228.68,641.32 v1(3230,640)
  BOT w10: v1(1070,640) 1514,640 1520,646 1520,647.24 1526,653.24 1544,653.24 1550,647.24 1550,640.97 1556,634.97 1574,634.97 1580,640.97 1580,647.24 1586,653.24 1604,653.24 1610,647.24 1610,640.97 1616,634.97 1634,634.97 1640,640.97 1640,647.24 1646,653.24 1664,653.24 1670,647.24 1670,640.97 1676,634.97 1694,634.97 1700,640.97 1700,647.24 1706,653.24 1724,653.24 1730,647.24 1730,640.97 1736,634.97 1754,634.97 1760,640.97 1760,647.24 1766,653.24 1784,653.24 1790,647.24 1790,640.97 1796,634.97 1814,634.97 1820,640.97 1820,647.24 1826,653.24 1844,653.24 1850,647.24 1850,640.97 1856,634.97 1874,634.97 1880,640.97 1880,647.24 1886,653.24 1904,653.24 1910,647.24 1910,640.97 1916,634.97 1934,634.97 1940,640.97 1940,647.24 1946,653.24 1964,653.24 1970,647.24 1970,640.97 1976,634.97 1994,634.97 2000,640.97 2000,647.24 2006,653.24 2024,653.24 2030,647.24 2030,640.97 2036,634.97 2054,634.97 2060,640.97 2060,647.24 2066,653.24 2084,653.24 2090,647.24 2090,640.97 2096,634.97 2114,634.97 2120,640.97 2120,647.24 2126,653.24 2144,653.24 2150,647.24 2150,640.97 2156,634.97 2174,634.97 2180,640.97 2180,647.24 2186,653.24 2204,653.24 2210,647.24 2210,640.97 2216,634.97 2234,634.97 2240,640.97 2240,647.24 2246,653.24 2264,653.24 2270,647.24 2270,640.97 2276,634.97 2294,634.97 2300,640.97 2300,647.24 2306,653.24 2324,653.24 2330,647.24 2330,640.97 2336,634.97 2354,634.97 2360,640.97 2360,647.24 2366,653.24 2384,653.24 2390,647.24 2390,640.97 2396,634.97 2414,634.97 2420,640.97 2420,647.24 2426,653.24 2444,653.24 2450,647.24 2450,640.97 2456,634.97 2474,634.97 2480,640.97 2480,647.24 2486,653.24 2504,653.24 2510,647.24 2510,640.97 2516,634.97 2534,634.97 2540,640.97 2540,647.24 2546,653.24 2564,653.24 2570,647.24 2570,640.97 2576,634.97 2594,634.97 2600,640.97 2600,647.24 2606,653.24 2624,653.24 2630,647.24 2630,640.97 2636,634.97 2654,634.97 2660,640.97 2660,647.24 2666,653.24 2684,653.24 2690,647.24 2690,640.97 2696,634.97 2714,634.97 2720,640.97 2720,647.24 2726,653.24 2744,653.24 2750,647.24 2750,640.97 2756,634.97 2774,634.97 2780,640.97 2780,647.24 2786,653.24 2804,653.24 2810,647.24 2810,646 2816,640 v1(3230,640)
GND: C1.2 C2.2 C3.2 C4.2 C5.2 C6.2 C7.2 C8.2 C9.2 C10.2 C11.2 C12.2 C13.2 C14.2 C15.2 C16.2 C17.2 C18.2 J1.A2 J1.A10 J1.B2 J1.B5 J1.C1 J1.C10 J1.C11 J1.D1 J1.D11 J1.F3 J1.F11 J1.G1 J1.G3 J1.G9 J1.G11 J1.H1 J1.H11 J1.J1 J1.J7 J1.J11 J1.K1 J1.K6 J1.K10 J1.L1 J1.L10 J2.A2 J2.A10 J2.B2 J2.B5 J2.C1 J2.C10 J2.C11 J2.D1 J2.D11 J2.F3 J2.F11 J2.G1 J2.G3 J2.G9 J2.G11 J2.H1 J2.H11 J2.J1 J2.J7 J2.J11 J2.K1 J2.K6 J2.K10 J2.L1 J2.L10 J3.1 J3.2 J3.3 J3.4 J3.5 J3.6 J3.35 J3.36 J6.1@4810,2935 J6.G1 J6.G2 J6.G3 J6.G4 J7.G1 J7.G2 J7.G3 J7.G4 J8.G1 J8.G2 J8.G3 J8.G4 J9.G1 J9.G2 J9.G3 J9.G4
RESET_0: J1.F2 J3.30 | length 6002.6
  BOT w10: J1.F2@801.46,1555 758.74,1512.28 758.74,519.04 892.62,385.16 3785.31,385.16 4251.66,851.5 5012.26,851.5 5051.75,890.99 5051.75,922.51 5084.24,955 5115.76,955 5146.5,985.74 5146.5,1158.5 J3.30@5100,1205
RESET_1: J2.F2 J3.29 | length 1615.3
  TOP w10: v2(4575,1725) 4575,1630 J3.29@5000,1205
  BOT w10: J2.F2@3727.36,1535 J2.F2@3730.49,1538.13 ; J2.F2@3730.79,1555 3731.09,1554.7 3770.08,1554.7 3820.38,1605 4069.29,1605 4189.29,1725 v2(4575,1725)
SPI_0_CS: J1.E10 J3.31 P1.4 | length 6750.6
  TOP w10: J1.E10@1601.46,1655 1658.74,1597.72 3470.35,1597.72 3656.65,1780 3676.65,1800 4305,1800 J3.31@5000,1105
  BOT w10: P1.4@969.72,2895 758.58,2895 510,2646.42 510,1786.05 698.33,1597.72 990.87,1597.72 1176.3,1412.28 1619.15,1412.28 1644.17,1437.31 1644.17,1612.28 J1.E10@1601.46,1655
SPI_0_MISO: J1.E9 J3.32 P1.1 | length 6516.4
  TOP w10: J1.E9@1501.46,1655 1544.17,1697.72 3507.72,1697.72 3707.72,1897.72 4241.52,1897.72 4462.17,1677.07 4966.94,1172.3 ccw(c5000,1205) 4967.21,1172.03 4967.3,1171.94 4980.74,1158.5 5046.5,1158.5 J3.32@5100,1105
  BOT w10: P1.1@1265,2895 1115,2745 693.43,2745 570,2621.57 570,2026.05 698.33,1897.72 819.15,1897.72 1061.87,1655 J1.E9@1501.46,1655
SPI_0_MOSI: J1.F10 J3.33 P1.2 | length 6415.8
  TOP w10: J1.F10@1601.46,1555 1658.74,1497.72 3402.72,1497.72 3602.82,1697.82 4307.18,1697.82 J3.33@5000,1005
  BOT w10: P1.2@1166.57,2895 1162.25,2890.68 1124.01,2890.68 998.34,2765 685.15,2765 550,2629.85 550,1946.05 698.33,1797.72 890.87,1797.72 1076.3,1612.28 1544.17,1612.28 J1.F10@1601.46,1555
SPI_0_SCK: J1.G10 J3.34 P1.3 | length 6548.5
  TOP w10: J1.G10@1601.46,1455 1658.74,1397.72 3385.43,1397.72 3587.72,1600 4239.58,1600 4880,959.58 4999.57,958.5 ccw(c5000,1005) 5000.94,958.51 5054.58,959.58 5057.51,962.51 J3.34@5100,1005
  BOT w10: P1.3@1068.15,2895 958.15,2785 676.86,2785 530,2638.14 530,1866.05 698.33,1697.72 919.15,1697.72 1104.58,1512.28 1544.17,1512.28 J1.G10@1601.46,1455
SPI_1_CS: J2.E10 J3.23 P2.4 | length 4458.5
  TOP w10: P2.4@3310,2855 3601.82,2563.18 3840.52,2563.18 4419.95,1983.76 4521.24,1983.76 J3.23@5000,1505
  BOT w10: J2.E10@2927.36,1435 2930.49,1431.87 2970.08,1431.87 3036.95,1365 3563.17,1365 3623.17,1305 4128.57,1305 4328.57,1505 J3.23@5000,1505
SPI_1_MISO: J2.E9 J3.24 P2.1 | length 4261.6
  TOP w10: P2.1@3605.28,2855 4235.43,2224.85 4342.67,2224.85 4909.02,1658.5 5012.26,1658.5 5053.5,1617.26 5053.5,1551.5 J3.24@5100,1505
  BOT w10: J2.E9@3027.36,1435 3566.95,1435 3601.95,1400 4195.29,1400 4346.79,1551.5 5053.5,1551.5 J3.24@5100,1505
SPI_1_MOSI: J2.F10 J3.25 P2.2 | length 5344.9
  TOP w10: P2.2@3506.85,2855 3549.41,2897.56 3732.44,2897.56 4871.5,1758.5 5012.26,1758.5 5046.5,1724.26 5046.5,1692.74 5080.74,1658.5 5112.26,1658.5 5146.5,1624.26 5146.5,1385.74 5119.26,1358.5 5046.5,1358.5 J3.25@5000,1405
  BOT w10: J2.F10@2927.36,1535 2962.36,1500 3992.57,1500 4147.57,1655 5115.76,1655 5146.5,1624.26 5146.5,1385.74 5119.26,1358.5 5046.5,1358.5 J3.25@5000,1405
SPI_1_SCK: J2.G10 J3.26 P2.3 | length 5000.8
  TOP w10: P2.3@3408.43,2855 3680.24,2583.18 3848.81,2583.18 4428.23,2003.76 4535.48,2003.76 4980.74,1558.5 5012.26,1558.5 5051.06,1519.7 5051.06,1453.94 J3.26@5100,1405
  BOT w10: J2.G10@2927.36,1635 2884.65,1592.28 2884.65,1417.31 2896.95,1405 2968.66,1405 3033.67,1340 3382.77,1340 3422.15,1300.62 3425.06,1297.72 3430.79,1297.72 cw(c3430.79,1255) 3473.5,1255 3473.5,1249.27 3476.41,1246.36 3514.84,1207.93 3517.77,1205 4257.52,1205 4260.45,1207.93 4504.02,1451.5 5053.5,1451.5 J3.26@5100,1405
pads on no net: J1. J1.A11 J2. J2.A11 J3.7 J3.8 J3.9 J3.10 J3.11 J3.12 J3.13 J3.14 J3.15 J3.16 J3.17 J3.18 J3.19 J3.20 J3.21 J3.22 J3.27 J3.28

## Polygon pours and split planes (outlines as drawn)
+VCORE on PWR "+VCORE_L03_P001" (solid, pour order 1): 5255,745 5255,0 0,0 0,745
+VIO/CLK on PWR "+VIO/CLK_L03_P002" (solid, pour order 2): 5255,755 0,755 0,3080 5255,3080
GND on GND "GND_L02_P000" (solid, pour order 0): 0,3080 5255,3080 5255,0 0,0
GND on BOT "GND_L04_P004" (solid, pour order 4): 0,3080 5255,3080 5255,0 0,0
GND on TOP "GND_L01_P003" (solid, pour order 3): 0,3080 5255,3080 5255,0 0,0

## Silkscreen, mask and mechanical layers (free items; w line width, h text height)
Top Overlay:
  text "Designed by Parker Schless - 2025" at 1150,2540 h80
  text "BRGTC6 Dual-Chip" at 750,225 h200
Mechanical 14:
  lines w10: 0,0 0,3080 5255,3080 5255,0 4590,0 0,0